# EAGLE board schematic (EAGLE 9.2.2)
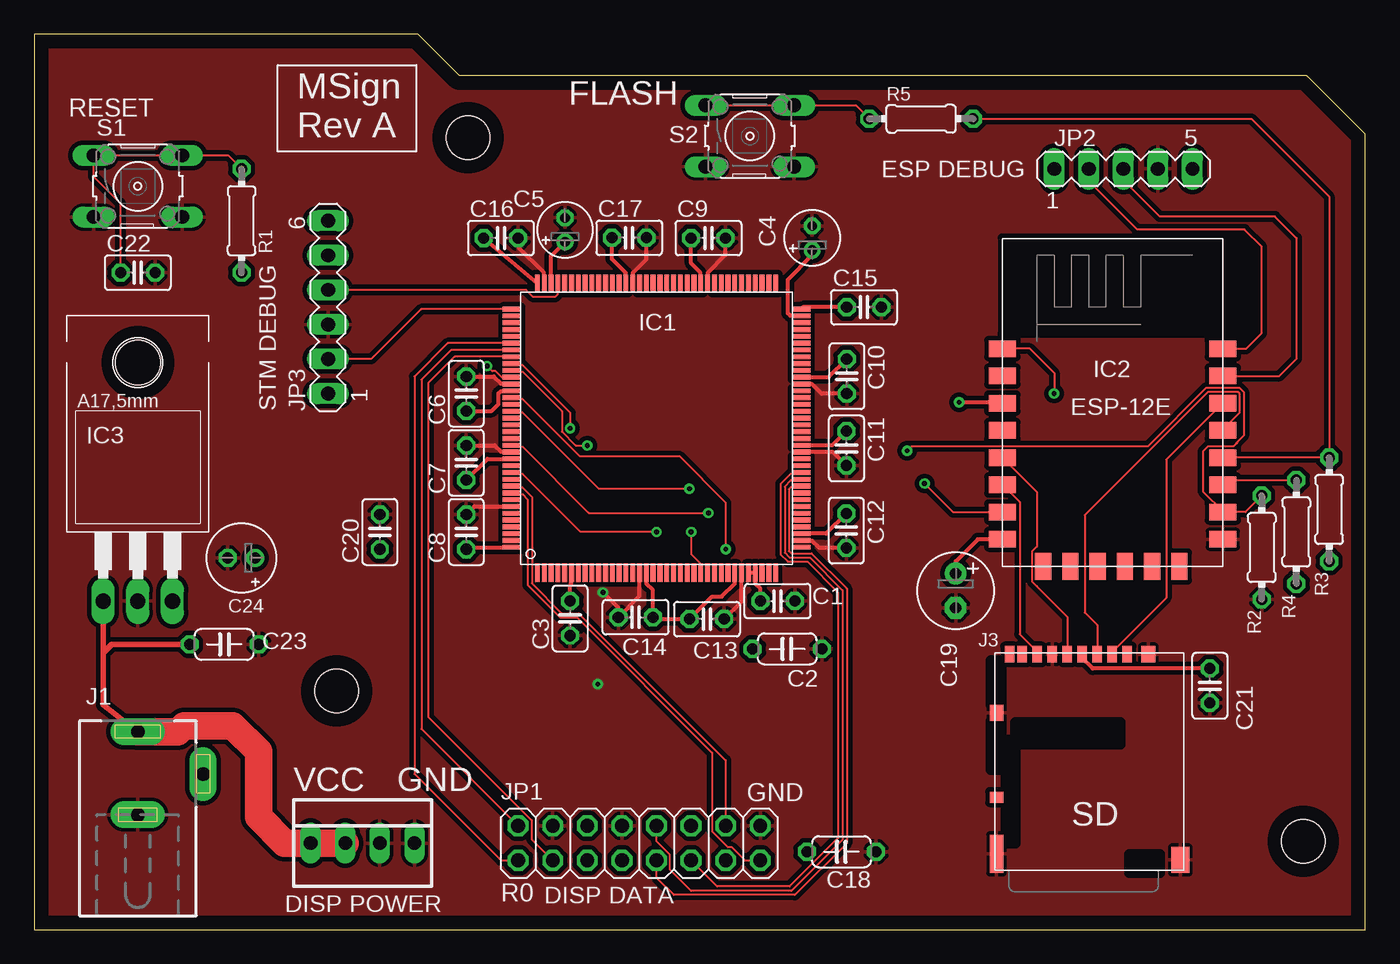
[diagram p0: board, top side]
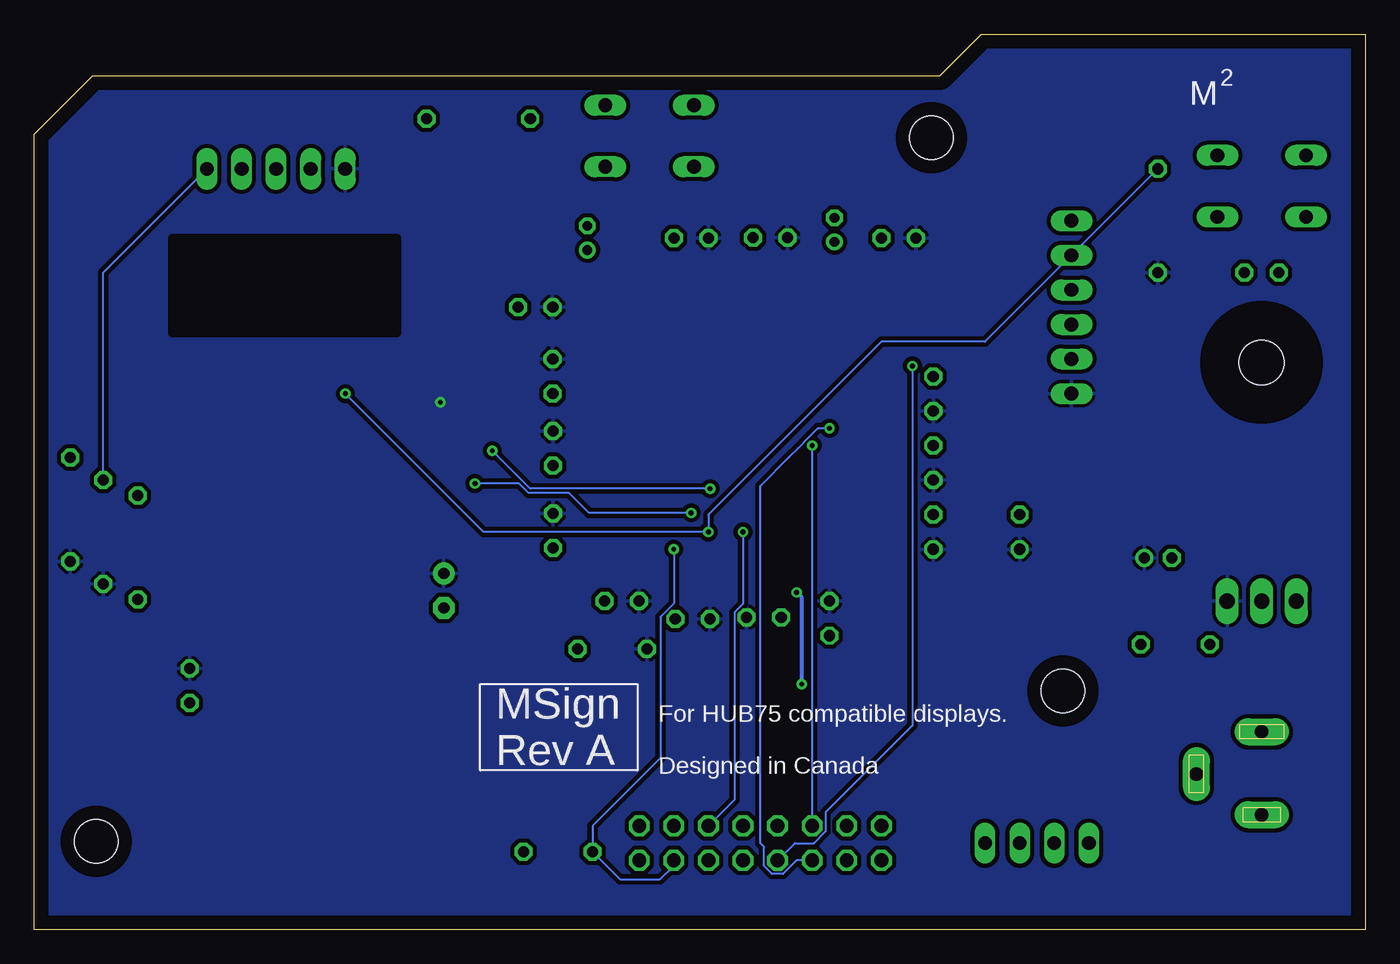
[diagram p1: board, bottom side, seen from below]

Size 97.79 x 65.79 mm. Coordinates in mm from the lower left corner, seen from the top.
Outline: 0,0 97.79,0 97.79,58.42 93.47,62.74 31.24,62.74 28.19,65.79 0,65.79 0,0
Copper layers (1*16): Top 0.035mm / dielectric 1.5mm / Bottom 0.035mm
Design rules "default": minimum track width 6mil, minimum drill 0.35mm, track to track 6mil, track to pad 6mil, pad to pad 6mil, via to via 6mil, smd to smd 6mil, copper to edge 40mil, drill to drill 6mil, minimum pad ring 10mil, minimum via ring 8mil, stop-mask expansion 4mil, vias tented up to drill 0mil, thermal gap 10mil
Holes 3.2 mm at 31.88,58.17 22.23,17.53 93.22,6.48

## Footprints (pad centres in the part's own frame; a part is rotated, then mirrored left to right if it is on the bottom)
C025-025X050 = drill 0.813 octagon: 1 -1.27,0; 2 1.27,0
C050-024X044 = drill 0.813 octagon: 1 -2.54,0; 2 2.54,0
E1,8-4 = drill 0.711 pad 1.168: + -0.889,0 | drill 0.711 pad 1.168 octagon: - 0.889,0
E2,5-6 = drill 0.813 pad 1.6: + -1.27,0 | drill 0.813 pad 1.6 octagon: - 1.27,0
E2-5 = drill 0.813 pad 1.27: + -1.016,0 | drill 0.813 pad 1.27 octagon: - 1.016,0
LQFP144 = smd 0.35 x 1.35: 1 -8.75,-10.625; 2 -8.25,-10.625; 3 -7.75,-10.625; 4 -7.25,-10.625; 5 -6.75,-10.625; 6 -6.25,-10.625; 7 -5.75,-10.625; 8 -5.25,-10.625; 9 -4.75,-10.625; 10 -4.25,-10.625; 11 -3.75,-10.625; 12 -3.25,-10.625; 13 -2.75,-10.62; 14 -2.25,-10.625; 15 -1.75,-10.625; 16 -1.25,-10.625; 17 -0.75,-10.625; 18 -0.25,-10.625; 19 0.25,-10.625; 20 0.75,-10.625; 21 1.25,-10.625; 22 1.75,-10.625; 23 2.25,-10.625; 24 2.75,-10.62; 25 3.25,-10.625; 26 3.75,-10.625; 27 4.25,-10.625; 28 4.75,-10.625; 29 5.25,-10.625; 30 5.75,-10.625; 31 6.25,-10.625; 32 6.75,-10.625; 33 7.25,-10.625; 34 7.75,-10.625; 35 8.25,-10.625; 36 8.75,-10.625; 73 8.75,10.625; 74 8.25,10.625; 75 7.75,10.625; 76 7.25,10.625; 77 6.75,10.625; 78 6.25,10.625; 79 5.75,10.625; 80 5.25,10.625; 81 4.75,10.625; 82 4.25,10.625; 83 3.75,10.625; 84 3.25,10.625; 85 2.75,10.625; 86 2.25,10.625; 87 1.75,10.625; 88 1.25,10.625; 89 0.75,10.625; 90 0.25,10.625; 91 -0.25,10.625; 92 -0.75,10.625; 93 -1.25,10.625; 94 -1.75,10.625; 95 -2.25,10.625; 96 -2.75,10.625; 97 -3.25,10.625; 98 -3.75,10.625; 99 -4.25,10.625; 100 -4.75,10.625; 101 -5.25,10.625; 102 -5.75,10.625; 103 -6.25,10.625; 104 -6.75,10.625; 105 -7.25,10.625; 106 -7.75,10.625; 107 -8.25,10.625; 108 -8.75,10.625 | smd 1.35 x 0.35: 37 10.625,-8.75; 38 10.625,-8.25; 39 10.625,-7.75; 40 10.625,-7.25; 41 10.625,-6.75; 42 10.625,-6.25; 43 10.625,-5.75; 44 10.625,-5.25; 45 10.625,-4.75; 46 10.625,-4.25; 47 10.625,-3.75; 48 10.625,-3.25; 49 10.625,-2.75; 50 10.625,-2.25; 51 10.625,-1.75; 52 10.625,-1.25; 53 10.625,-0.75; 54 10.625,-0.25; 55 10.625,0.25; 56 10.625,0.75; 57 10.625,1.25; 58 10.625,1.75; 59 10.625,2.25; 60 10.625,2.75; 61 10.625,3.25; 62 10.625,3.75; 63 10.625,4.25; 64 10.625,4.75; 65 10.625,5.25; 66 10.625,5.75; 67 10.625,6.25; 68 10.625,6.75; 69 10.625,7.25; 70 10.625,7.75; 71 10.625,8.25; 72 10.625,8.75; 109 -10.625,8.75; 110 -10.625,8.25; 111 -10.625,7.75; 112 -10.625,7.25; 113 -10.625,6.75; 114 -10.625,6.25; 115 -10.625,5.75; 116 -10.625,5.25; 117 -10.625,4.75; 118 -10.625,4.25; 119 -10.625,3.75; 120 -10.625,3.25; 121 -10.625,2.75; 122 -10.625,2.25; 123 -10.625,1.75; 124 -10.625,1.25; 125 -10.625,0.75; 126 -10.625,0.25; 127 -10.625,-0.25; 128 -10.625,-0.75; 129 -10.625,-1.25; 130 -10.625,-1.75; 131 -10.625,-2.25; 132 -10.625,-2.75; 133 -10.625,-3.25; 134 -10.625,-3.75; 135 -10.625,-4.25; 136 -10.625,-4.75; 137 -10.625,-5.25; 138 -10.625,-5.75; 139 -10.625,-6.25; 140 -10.625,-6.75; 141 -10.625,-7.25; 142 -10.625,-7.75; 143 -10.625,-8.25; 144 -10.625,-8.75
ESP8266-ESP12E = smd 2 x 1.2: 1 -7.62,5.84; 2 -7.62,3.84; 3 -7.62,1.84; 4 -7.62,-0.16; 5 -7.62,-2.16; 6 -7.62,-4.16; 7 -7.62,-6.16; 8 -7.62,-8.16; 9 8.58,-8.16; 10 8.58,-6.16; 11 8.58,-4.16; 12 8.58,-2.16; 13 8.58,-0.16; 14 8.58,1.84; 15 8.58,3.84; 16 8.58,5.84 | smd 1.2 x 2: 17 -4.62,-10.16; 18 -2.62,-10.16; 19 -0.62,-10.16; 20 1.38,-10.16; 21 3.38,-10.16; 22 5.38,-10.16
TO220 = drill 1.118 long: 1 -2.54,-10.16; 2 0,-10.16; 3 2.54,-10.16 | hole 3.302: 0,7.366
DCJ0202 = drill 1 pad 2 long: 1 0,3.1; 2 4.8,0; 3 0,-3
DM3AT-SF-PEJM5 = smd 0.7 x 1.2: 1 3.2,-0.1; 2 2.1,-0.1; 3 1,-0.1; 4 -0.1,-0.1; 5 -1.2,-0.1; 6 -2.3,-0.1; 7 -3.4,-0.1; 8 -4.5,-0.1; B -5.45,-0.1 | smd 1 x 0.8: A -6.4,-10.6 | smd 1 x 1.2: MOUNT0 4.75,-0.1; MOUNT1 -6.4,-4.4 | smd 1 x 2.8: MOUNT2 -6.4,-14.75 | smd 1.3 x 1.9: MOUNT3 7.1,-15.2
2X08 = drill 1.016 octagon: 1 -8.89,-1.27; 2 -8.89,1.27; 3 -6.35,-1.27; 4 -6.35,1.27; 5 -3.81,-1.27; 6 -3.81,1.27; 7 -1.27,-1.27; 8 -1.27,1.27; 9 1.27,-1.27; 10 1.27,1.27; 11 3.81,-1.27; 12 3.81,1.27; 13 6.35,-1.27; 14 6.35,1.27; 15 8.89,-1.27; 16 8.89,1.27
MA05-1 = drill 1.016 long: 1 -5.08,0; 2 -2.54,0; 3 0,0; 4 2.54,0; 5 5.08,0
MA06-1 = drill 1.016 long: 1 -6.35,0; 2 -3.81,0; 3 -1.27,0; 4 1.27,0; 5 3.81,0; 6 6.35,0
0204/7 = drill 0.813 octagon: 1 -3.81,0; 2 3.81,0
B3F-10XX = drill 1.016 long: 1 -3.251,2.261; 2 3.251,2.261; 3 -3.251,-2.261; 4 3.251,-2.261
22-23-2041 = drill 1 long: 1 -3.81,0; 2 -1.27,0; 3 1.27,0; 4 3.81,0

## Placement (x,y rotation side)
C1  100nF  [C025-025X050]  54.61,24.13 180 top
C2  1uF  [C050-024X044]  55.32,20.61 180 top
C3  100nF  [C025-025X050]  39.37,22.86 90 top
C4  2.2uF  [E1,8-4]  57.15,50.8 90 top
C5  2.2uF  [E1,8-4]  39,51.4 90 top
C6  100nF  [C025-025X050]  31.75,39.37 90 top
C7  100nF  [C025-025X050]  31.75,34.29 90 top
C8  100nF  [C025-025X050]  31.75,29.21 90 top
C9  100nF  [C025-025X050]  49.53,50.8 0 top
C10  100nF  [C025-025X050]  59.69,40.64 270 top
C11  100nF  [C025-025X050]  59.67,35.34 270 top
C12  100nF  [C025-025X050]  59.66,29.3 270 top
C13  100nF  [C025-025X050]  49.42,22.81 0 top
C14  100nF  [C025-025X050]  44.18,22.94 180 top
C15  100nF  [C025-025X050]  60.96,45.72 0 top
C16  100nF  [C025-025X050]  34.29,50.8 0 top
C17  100nF  [C025-025X050]  43.71,50.82 0 top
C18  10pF  [C050-024X044]  59.31,5.71 180 top
C19  100uF  [E2,5-6]  67.69,24.89 270 top
C20  10uF  [C025-025X050]  25.4,29.21 90 top
C21  100nF  [C025-025X050]  86.36,17.91 270 top
C22  470pF  [C025-025X050]  7.62,48.26 0 top
C23  0.47uF  [C050-024X044]  13.97,20.95 0 top
C24  33uF  [E2-5]  15.24,27.3 180 top
IC1  STM32F207ZGT  [LQFP144]  45.72,36.83 0 top
IC2  [ESP8266-ESP12E]  78.74,36.83 0 top
IC3  LM3940  [TO220]  7.62,34.29 0 top
J1  DCJ0202  [DCJ0202]  7.62,11.43 0 top
J3  DM3AT-SF-PEJM5  [DM3AT-SF-PEJM5]  77.09,20.32 0 top
JP1  [2X08]  44.45,6.35 0 top
JP2  [MA05-1]  80.01,55.88 0 top
JP3  [MA06-1]  21.59,45.72 90 top
R1  12k  [0204/7]  15.24,52.07 270 top
R2  12k  [0204/7]  90.17,28.07 90 top
R3  12k  [0204/7]  95.12,30.86 90 top
R4  12k  [0204/7]  92.71,29.21 90 top
R5  470  [0204/7]  65.15,59.56 0 top
S1  [B3F-10XX]  7.62,54.61 0 top
S2  [B3F-10XX]  52.58,58.29 0 top
X2  22-23-2041  [22-23-2041]  24.13,6.35 0 top

## Library data of the parts
C1-C24 = rcl; SPICEPREFIX: C
IC1 = micro-stm_v3
IC2 = esp12e
IC3 = LM3940; AVAILABILITY: Unavailable; MF: National Semiconductor; MP: LM3940; PACKAGE: None; PRICE: None
J1 = con-jack; OC_FARNELL: unknown; OC_NEWARK: unknown
J3 = connector; DESCRIPTION: CONN MICRO SD CARD PUSH-PUSH R/A; DIGIKEY: HR1964CT-ND; MANUFACTURER: Hirose Electric Co Ltd; MPN: DM3AT-SF-PEJM5
JP1 = pinhead
JP2 JP3 = con-lstb; OC_FARNELL: unknown; OC_NEWARK: unknown
R1-R5 = rcl; SPICEPREFIX: R
S1 S2 = switch-omron; MPN: B3F-1000; OC_FARNELL: 176432; OC_NEWARK: 36M3542
X2 = con-molex; MF: MOLEX; MPN: 22-23-2041; OC_FARNELL: 1462920; OC_NEWARK: 38C0355

## Nets
+3V3: C1.2 C2.2 C3.2 C6.1 C7.1 C8.1 C9.1 C10.1 C11.1 C12.1 C13.1 C14.1 C15.1 C16.1 C17.1 C19.+ C20.1 C21.1 C24.+ IC1.6 IC1.17 IC1.30 IC1.32 IC1.33 IC1.39 IC1.52 IC1.62 IC1.72 IC1.84 IC1.95 IC1.108 IC1.121 IC1.131 IC1.144 IC2.3 IC2.8 IC3.3 J3.4 JP2.1 JP3.1 R1.2 R3.1 R4.1
+5V: C23.1 IC3.1 J1.1 X2.1 X2.2
A: IC1.46 JP1.9
B: IC1.47 JP1.10
B0: IC1.116 JP1.3
B1: IC1.119 JP1.7
C: IC1.48 JP1.11
D: IC1.133 JP1.12
DCLK: C18.2 IC1.122 JP1.13
DEBUG_TX: IC2.11 JP2.5 R4.2
ESP_PROG_RX: IC2.15 JP2.3
ESP_PROG_TX: IC2.16 JP2.2
FLASH: IC2.12 R3.2 R5.2
G0: IC1.115 JP1.2
G1: IC1.118 JP1.6
GND: C1.1 C2.1 C3.1 C4.- C5.- C6.2 C7.2 C8.2 C9.2 C10.2 C11.2 C12.2 C13.2 C14.2 C15.2 C16.2 C17.2 C18.1 C19.- C20.2 C21.2 C22.2 C23.2 C24.- IC1.16 IC1.31 IC1.38 IC1.51 IC1.61 IC1.83 IC1.94 IC1.107 IC1.120 IC1.130 IC1.138 IC2.9 IC3.2 J1.3 J3.6 J3.MOUNT0 J3.MOUNT1 J3.MOUNT2 J3.MOUNT3 JP1.4 JP1.8 JP1.16 JP2.4 JP3.3 R2.1 S1.3 S1.4 S2.3 S2.4 X2.3 X2.4
LAT: IC1.135 JP1.14
MISO: IC2.6 J3.7
MOSI: IC2.13 J3.3
N$1: R5.1 S2.1 S2.2
N$2: C5.+ IC1.106
N$3: C4.+ IC1.71
OE: IC1.136 JP1.15
R0: IC1.114 JP1.1
R1: IC1.117 JP1.5
RESET: C22.1 IC1.25 IC2.1 JP3.5 R1.1 S1.1 S1.2
RX: IC1.124 IC2.10 R2.2
SCLK: IC2.5 J3.5
SDCS: IC2.14 J3.2
SWCLK: IC1.109 JP3.2
SWDIO: IC1.105 JP3.4
TX: IC1.129 IC2.7

## Tracks (layer width: path | path; a pad name or v marks a point on that pad's centre or on a via)
+3V3  (via drill 0.35)
  Top 0.305: IC1.108 C16.1 | IC1.95 43.45,47.48 43.45,48.26 42.44,49.27 C17.1 | IC1.84 48.95,47.48 48.95,48.26 48.26,48.95 C9.1 | IC2.8 69.31,28.67 67.69,27.05 C19.+ | C1.2 53.34,25.05 52.99,25.4 52.99,26.18 IC1.33 IC1.32 | IC1.30 51.47,25.42 50.51,24.46 49.81,24.46 C13.1 45.59,22.81 C14.1 45.45,24.94 44.99,25.4 44.99,26.18 IC1.17 | C3.2 39.37,25.32 39.45,25.4 39.45,26.18 IC1.6 | C8.1 31.89,28.08 IC1.144 | C7.1 33.31,34.58 IC1.131 | C6.1 33.62,38.1 34.12,38.6 34.12,39.38 34.29,39.56 35.08,39.56 IC1.121 | C15.1 56.48,45.72 IC1.72 | IC1.62 58.36,40.58 C10.1 | IC1.52 58.64,35.58 C11.1 | C12.1 58.17,29.08 IC1.39 | v67.94,38.73 71.06,38.73 IC2.3 | J3.4 76.99,20.09 76.93,20.03 76.93,20 77.75,19.18 C21.1
  pour Bottom (isolate 0.305): -0.13,65.91 97.79,65.91 97.79,0 -0.13,0
+5V
  Top 0.406: IC3.1 5.08,20.32 | 5.08,20.32 5.08,16.51 J1.1 | C23.1 5.71,20.95 5.08,20.32
  Top 2.032: J1.1 10.56,14.53 11.01,14.98 14.59,14.98 16.49,13.07 16.49,8.27 18.41,6.35 X2.1 X2.2
A
  Top 0.152: IC1.46 56.25,32.48 55.58,32.48 55.44,32.35 55.44,27.81 55.62,27.64 57.1,27.64 59.69,25.05 59.69,6.35 55.88,2.54 46.99,2.54 45.72,3.81 JP1.9
B
  Top 0.152: IC1.47 56.25,32.98 55.58,32.98 55.14,32.55 55.14,27.68 55.49,27.33 56.98,27.33 59.38,24.92 59.38,6.6 55.63,2.85 48.26,2.85 46.71,4.39 46.71,5.49 45.72,6.48 JP1.10
B0
  Top 0.152: IC1.116 30.9,42.08 28.96,40.13 28.96,15.62 36.55,8.03 36.55,6.63 JP1.3
B1  (via drill 0.35)
  Top 0.152: IC1.119 34.35,40.58 33.91,41.02 33.66,41.02 v33.27,41.4
  Bottom 0.152: v33.27,41.4 33.27,14.99 39.65,8.61 39.65,7.21 40.51,6.35 41.91,6.35 JP1.7
C
  Top 0.152: IC1.48 56.25,33.48 55.58,33.48 54.83,32.74 54.83,27.56 55.36,27.03 56.79,27.03 59.05,24.77 59.05,6.73 55.5,3.17 50.16,3.17 JP1.11
D  (via drill 0.35)
  Top 0.152: v45.72,29.21 40.14,29.21 35.87,33.48 35.19,33.48 IC1.133
  Bottom 0.152: JP1.12 46.34,9.54 46.34,23.31 45.72,23.93 v45.72,29.21
DCLK  (via drill 0.35)
  Top 0.152: IC1.122 35.19,38.98 35.87,38.98 40.08,34.77 47.4,34.77 50.8,31.37 v50.8,27.94
  Bottom 0.152: v50.8,27.94 50.8,23.96 51.79,22.97 51.79,12.6 56.77,7.62 C18.2 54.74,3.68 51.82,3.68 50.8,4.7 JP1.13
DEBUG_TX
  Top 0.152: IC2.11 87.67,33.02 R4.2
  Bottom 0.152: R4.2 92.71,48.26 JP2.5
ESP_PROG_RX
  Top 0.152: IC2.15 91.47,40.67 92.71,41.91 92.71,50.8 91.14,52.38 82.68,52.38 80.01,55.04 JP2.3
ESP_PROG_TX
  Top 0.152: IC2.16 89.03,42.67 90.17,43.81 90.17,50.16 88.9,51.44 81.03,51.44 77.47,54.99 JP2.2
FLASH
  Top 0.152: IC2.12 R3.2 95.12,53.85 89.41,59.56 R5.2
G0
  Top 0.152: IC1.115 30.64,42.58 28.45,40.39 28.45,14.73 JP1.2
G1  (via drill 0.35)
  Top 0.152: IC1.118 35.19,40.98 35.87,40.98 38.76,38.09 38.76,36.58 39.78,35.56 v40.64,35.56
  Bottom 0.152: v40.64,35.56 JP1.6
GND  (via drill 0.35)
  Top 0.305: IC1.107 37.45,47.48 37.45,48.26 35.56,50.15 C16.2 | IC1.94 43.99,47.48 43.99,48.26 44.98,49.25 C17.2 | IC1.83 49.49,47.48 49.49,48.26 50.8,49.57 C9.2 | C13.2 51.97,24.08 IC1.31 | IC1.16 44.47,24.5 C14.2 42.91,23.64 v41.78,24.77 | C8.2 32.35,31.08 IC1.138 | IC1.130 35.08,35.1 34.29,35.1 33.83,35.56 C7.2 | IC1.120 35.08,40.1 34.29,40.1 33.75,40.64 C6.2 | IC1.61 56.37,40.06 57.15,40.06 57.84,39.37 C10.2 | C11.2 58.67,35.08 IC1.51 | IC1.38 56.37,28.56 57.15,28.56 57.67,28.03 C12.2
  Bottom 0.305: v41.4,18.03 41.4,24.38 v41.78,24.77
  pour Top (isolate 0.33): 0,65.91 97.79,65.91 97.79,0 0,0
LAT
  Top 0.152: IC1.135 35.19,32.48 35.87,32.48 36.57,31.78 36.57,25.43 38.76,23.24 39.99,23.24 50.8,12.44 JP1.14
MISO
  Top 0.152: IC2.6 72.39,31.4 72.39,21.69 73.68,20.41 73.68,20.23 J3.7
MOSI
  Top 0.152: IC2.13 87.32,36.75 88.55,37.98 88.55,39.37 88.42,39.5 86.22,39.5 77.16,30.44 77.16,23.29 78.09,22.36 J3.3
N$1
  Top 0.152: S2.1 S2.2 60.35,60.55 R5.1
N$2
  Top 0.305: IC1.106 37.97,49.48 C5.+
N$3
  Top 0.305: IC1.71 56.33,45.1 55.54,45.1 55.37,45.28 55.37,47.74 57.15,49.53 C4.+
OE
  Top 0.152: IC1.136 35.19,31.98 35.87,31.98 36.26,31.59 36.26,25.31 38.63,22.94 39.87,22.94 49.81,13 49.81,7.21 50.95,6.07 51.21,6.07 52.2,5.08 JP1.15
R0
  Top 0.152: IC1.114 30.38,43.08 27.94,40.64 27.94,11.43 34.29,5.08 JP1.1
R1  (via drill 0.35)
  Top 0.152: IC1.117 35.19,41.48 35.87,41.48 39.37,37.98 v39.37,36.83
  Bottom 0.152: JP1.5 41.78,5.08 42.77,4.09 43.59,4.09 44.17,4.67 44.17,6.07 44.45,6.35 44.45,32.59 42.33,34.71 41.69,35.34 41.25,35.79 41.25,35.81 40.23,36.83 v39.37,36.83
RESET  (via drill 0.35)
  Top 0.152: C22.1 6.35,53.34 4.37,55.32 S1.1 S1.2 14.25,56.87 R1.1 | IC1.25 48.87,26.3 48.87,26.98 48.26,27.59 v48.26,29.21 | v74.93,39.37 74.93,40.89 73.15,42.67 IC2.1
  Bottom 0.152: R1.1 JP3.5 27.94,43.18 35.56,43.18 48.26,30.48 v48.26,29.21 64.77,29.21 v74.93,39.37
RX  (via drill 0.35)
  Top 0.152: v48.13,32.38 41.46,32.38 35.87,37.98 35.19,37.98 IC1.124 | v64.14,35.18 64.45,35.5 81.79,35.5 86.1,39.8 88.54,39.8 88.85,39.49 88.85,36.28 88.39,35.82 88.29,35.71 88.07,35.5 86.22,35.5 85.85,35.12 85.85,32.2 87.38,30.67 | IC2.10 87.38,30.67 | R2.2 88.97,30.67 87.38,30.67
  Bottom 0.152: v48.13,32.38 61.34,32.38 v64.14,35.18
SCLK
  Top 0.152: IC2.5 73.66,32.13 73.66,28.13 73.29,27.77 73.29,25.57 73.56,25.3 73.66,25.21 75.89,22.98 J3.5
SDCS
  Top 0.152: IC2.14 83.16,34.51 83.16,24.37 79.2,20.41 79.2,20.23 J3.2
SWCLK
  Top 0.152: IC1.109 28.43,45.58 24.77,41.91 JP3.2
SWDIO
  Top 0.152: 38.45,47.44 38.45,46.65 38.27,46.48 36.67,46.48 36.15,46.99 JP3.4
  Top 0.305: IC1.105 38.45,47.44
TX  (via drill 0.35)
  Top 0.152: v49.53,30.61 40.74,30.61 35.87,35.48 35.19,35.48 IC1.129 | v65.41,32.77 67.5,30.67 IC2.7
  Bottom 0.152: v49.53,30.61 57.02,30.61 58.5,32.08 61.47,32.08 62.15,32.77 v65.41,32.77

## Text on the board
tPlace: FLASH | RESET | MSign / Rev A | ESP DEBUG | STM DEBUG | VCC | GND | GND | SD | R0 | DISP DATA | DISP POWER
bPlace: 2 | M | MSign / Rev A | For HUB75 compatible displays. / / Designed in Canada